# Altium PCB CH340G9T-R0.PcbDoc
Units mil, origin at the board's own origin, x right, y up, seen from the top; angles counter-clockwise.
Board outline 637.64 x 1267.43 mil, 2 copper layers (Top Layer, Bottom Layer); 15 components, 18 nets, 60 pads, 69 vias.
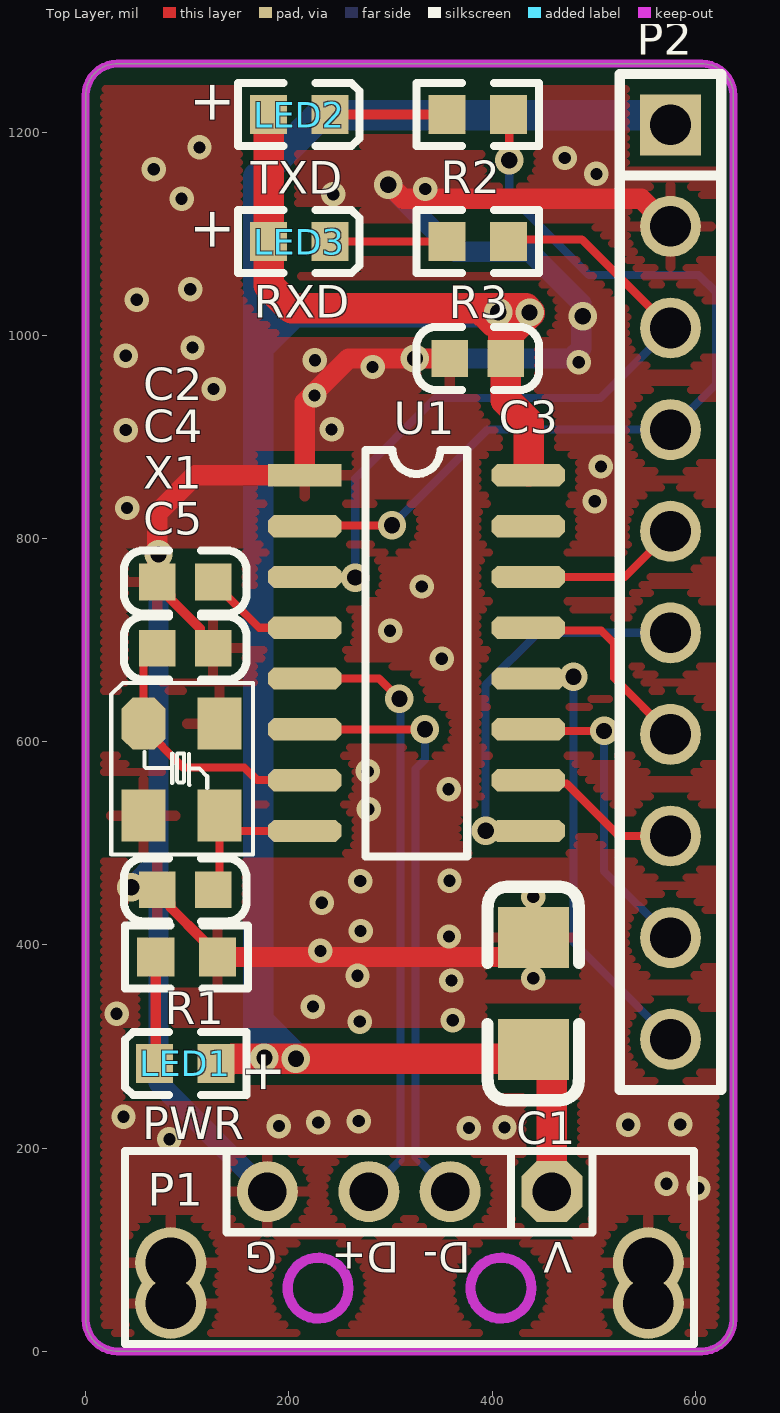
[diagram p0: Top Layer view]
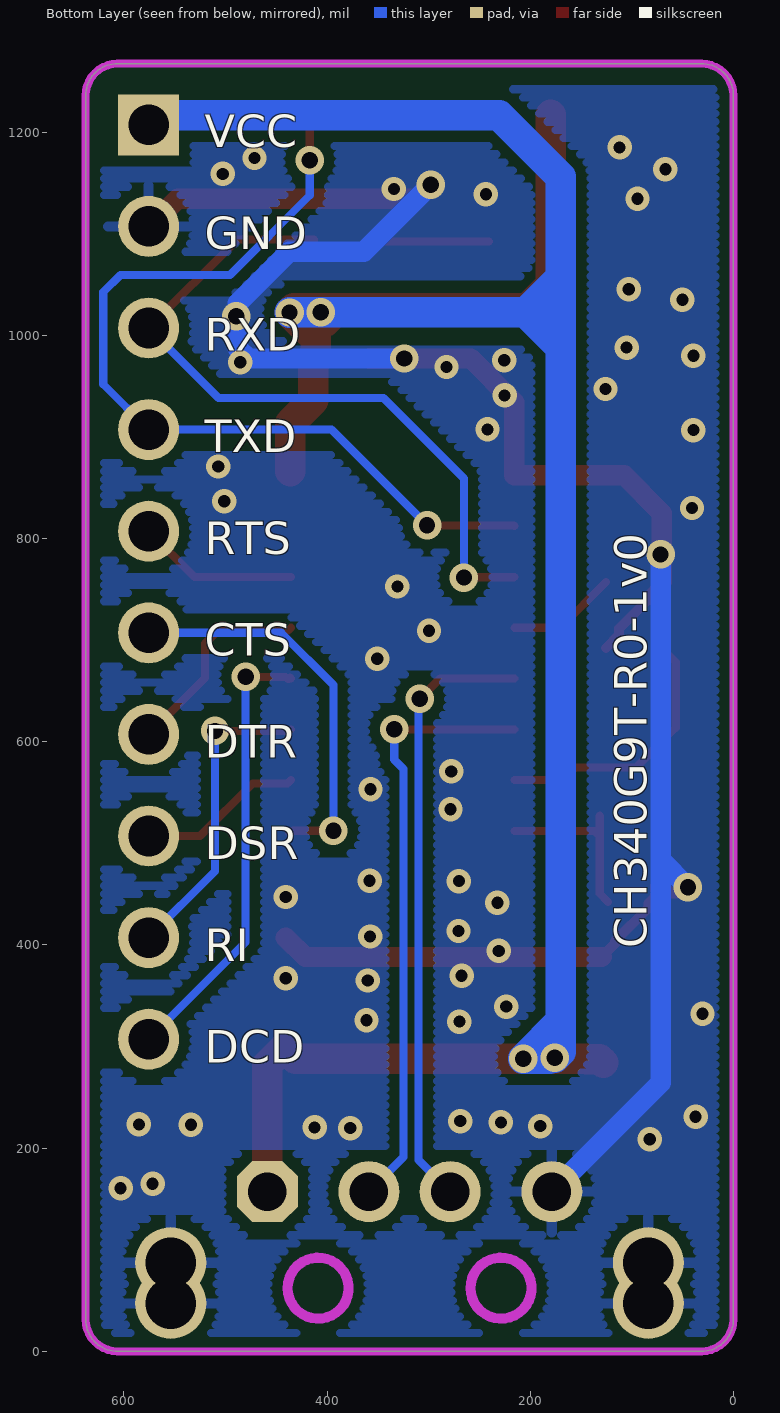
[diagram p1: Bottom Layer view, seen from below]

## Layer stack, top to bottom
Top Solder: solder mask 0.4, Solder Resist, Dk 3.5
Top Layer: signal copper 1.4
Dielectric 1: dielectric 12.6, FR-4, Dk 4.8
Bottom Layer: signal copper 1.4
Bottom Solder: solder mask 0.4, Solder Resist, Dk 3.5

## Board outline
0,31.5 ccw(c31.5,31.5) 31.5,0 606.14,0 ccw(c606.14,31.5) 637.64,31.5 637.64,1235.94 ccw(c606.14,1235.94) 606.14,1267.43 31.5,1267.43 ccw(c31.5,1235.94) 0,1235.94

## Design rules (kind name [scope] priority, off if disabled: settings)
Clearance Clearance_1 [InPolygon] p1: gap=10 ignorepadtopadclearanceinfootprint=FALSE
Clearance [All] p2: gap=6 ignorepadtopadclearanceinfootprint=FALSE
ComponentClearance [All] p1 off: gap=10 collisioncheckmode=3 verticalgap=10 showdistances=FALSE
DiffPairsRouting [All] p1: maxlimit=10 minlimit=7 mostfreqgap=8 toplayer_minwidth=6 toplayer_maxwidth=15 toplayer_prefwidth=8 bottomlayer_minwidth=6 bottomlayer_maxwidth=15 bottomlayer_prefwidth=8 maxuncoupledlength=500
MinimumSolderMaskSliver [All] p1 off: minsoldermaskwidth=10
PolygonConnect PolygonConnect_1 [IsVia] p1: connectstyle=Direct reliefconductorwidth=10 reliefentries=4 polygonreliefangle="90 Angle" airgapwidth=10
PolygonConnect [All] p2: connectstyle=Relief reliefconductorwidth=10 reliefentries=4 polygonreliefangle="90 Angle" airgapwidth=10
RoutingVias [All] p1: holewidth=16 width=28 viastyle="Through Hole" minholewidth=12 minwidth=24 maxholewidth=28 maxwidth=50
SilkToSilkClearance [All] p1 off: silktosilkclearance=10
SilkToSolderMaskClearance [IsPad] p1 off: minsilkscreentomaskgap=10 clearancetoexposedcopper=TRUE
SolderMaskExpansion [All] p1: expansion=4 istentingtop=FALSE
Width [All] p1: maxlimit=100 minlimit=6 preferedwidth=10
25 further rules are at their usual default settings.

## Components (designator, comment, footprint, x,y, rotation, side; value= is the part's Value field where it differs from the comment)
C1 "10uF" 3216_C 440.64,297.23 r270 top
C2 "0.1uF" 0603_C 125.51,757.23 r180 top
C3 "0.1uF" 0603_C 413.44,977.23 r180 top
C4 "33p" 0603_C 70.52,692.23 r0 top
C5 "33p" 0603_C 125.51,454.23 r180 top
LED1 "PWR" 0603+ 128.33,283.23 r180 top
LED2 "TXD" 0603+ 180.01,1217.23 r0 top
LED3 "RXD" 0603+ 180.01,1092.23 r0 top
P1 "USB" USBAM 458.82,157.23 r180 top
P2 "Header 10H" SIP10-2.54mm 575.64,1207.23 r0 top
R1 "2K" 0603 69.08,388.23 r0 top
R2 "2K" 0603 355.64,1217.23 r0 top
R3 "2K" 0603 355.64,1092.23 r0 top
U1 "CH340G" SOP16 215.64,862.23 r270 top
X1 "12MHz" XT3225 56.83,617.78 r270 top

## Footprints (in the part's own frame and the unit in brackets; to place one, negate y for a bottom-side part, rotate by r counter-clockwise, add the part's x,y. Pads: shape width x height; smd on the part's side, far side on the other; paste and mask are expansions set on the pad)
0603 [mm]
  rect 0.93x0.98 smd: 1(0,0) 2(1.54,0)
  silkscreen extent -0.76,-0.79 2.3,0.79
0603+ [mm]
  rect 0.93x0.98 smd: 1(0,0) 2(1.54,0)
  silkscreen extent -0.76,-0.79 2.27,0.79
0603_C [mil]
  rect 36x36 smd: 1(0,0) 2(55,0)
  silkscreen extent -33,-31 88,31
3216_C [mil]
  rect 60x70 smd: 1(0,0) 2(-110,0)
  silkscreen extent -160,-45 50,45
SIP10-2.54mm [mil]
  rect 60x60 hole 40: 1(0,0)
  round 60 hole 40: 2(0,-100) 3(0,-200) 4(0,-300) 5(0,-400) 6(0,-500) 7(0,-600) 8(0,-700) 9(0,-800) 10(0,-900)
  silkscreen extent -50,-950 50,50
SOP16 [mil]
  rect 22x72 smd: 1(0,0)
  oct 22x72 smd: 2(50,0) 3(100,0) 4(150,0) 5(200,0) 6(250,0) 7(300,0) 8(350,0) 9(350,220) 10(300,220) 11(250,220) 12(200,220) 13(150,220) 14(100,220) 15(50,220) 16(0,220)
  silkscreen extent -25,60 375,160
USBAM [mil]
  round 70 hole 50: 0(-95,70) 0(-95,110) 0(375,70) 0(375,110)
  oct 60x60 hole 38: 1(0,0)
  round 60 hole 38: 2(100,0) 3(180,0) 4(280,0)
  Keep-Out Layer circle w10: c50,95 r30
  Keep-Out Layer circle w10: c230,95 r30
  silkscreen extent -140,-40 420,150
XT3225 [mm]
  oct 1.3x1.1 smd: 1(0,0)
  rect 1.3x1.1 smd: 2(2.3,0) 3(2.3,1.9) 4(0,1.9)
  silkscreen extent -1.02,-0.8 3.27,2.74

## Part data
C1 C2 C3 C4 C5: library part CAP, "Capacitor"
LED1 LED2 LED3: library part LED2, "Typical RED, GREEN, YELLOW, AMBER GaAs LED"
P2: "Header, 10-Pin, Right Angle", LatestRevisionDate=17-Jul-2002, LatestRevisionNote="Re-released for DXP Platform.", Publisher="Altium Limited"
R1 R2 R3: library part Res2, "Resistor"
U1: "USB to TTL Serial / UART"
X1: library part CRYSTAL, "Crystal"

## Via types
v1: diameter 24, hole 12, Top Layer to Bottom Layer, 52 vias
v2: diameter 28, hole 16, Top Layer to Bottom Layer, 17 vias

## Nets (pads, with @x,y where several pads share a name; then routed paths per layer and width w, separated by ;. In a path a pad name is that pad's centre, name@x,y a point inside that pad or via, vN(x,y) a via of type N, cw(c..) or ccw(c..) an arc to the next point about the centre after c; other vN are vias at no path point)
CTS: P2.6 U1.9 | length 394.6
  Top Layer w8: v2(393.71,512.44) 433.21,512.44 436.32,509.33 437.43,510.43 U1.9
  Bottom Layer w8: v2(393.71,512.44) 393.71,655.87 445.07,707.23 P2.6
DCD: P2.10 U1.12 | length 442.9
  Top Layer w8: U1.12 436.46,663.05 437.89,661.62 438.27,662 438.62,661.65 440.83,663.85 v2(480.17,663.85)
  Bottom Layer w8: v2(480.17,663.85) 480.17,402.69 P2.10
DSR: P2.8 U1.10 | length 162.8
  Top Layer w8: U1.10 438.89,558.97 473.2,558.97 524.94,507.23 P2.8
DTR: P2.7 U1.13 | length 203.4
  Top Layer w8: U1.13 438.54,709.32 507.5,709.32 520.25,696.56 520.25,662.61 P2.7
GND: C1.2 C2.2 C3.2 C4.2 C5.2 P1.0 P1.4 P2.2 R1.2 U1.1 X1.2 X1.4 | length 2440.2
  Top Layer w10: C2.2 83.51,744.23 83.51,740.47 112.52,711.45 112.52,705.23 C4.2 ; C5.2@72.51,452.23 83.51,441.23 83.51,436.89 116.4,404 116.4,401.53 R1.2
  Top Layer w20: v2(44.84,456.74) 46.1,455.48 71.45,455.48 C5.2@72.12,456.16 ; C2.2 v2@70.51,784.33 ; v2(71.72,784.33) v2@70.51,784.33 ; R1.2 421.64,388.23 C1.2 ; v2(297.91,1148.16) 299.03,1148.16 312.71,1134.48 546.85,1134.48 574.1,1107.23 P2.2 ; C3.2 v2(324.11,977.23) 258.74,977.23 215.64,934.12 U1.1 107.65,862.23 70.51,825.08 v2@70.51,784.33
  Bottom Layer w20: v2(44.84,456.74) 71.72,483.62 ; v2(71.72,784.33) 71.72,483.62 ; P1.4 71.72,264.32 71.72,483.62 ; v2(297.91,1148.16) 363.91,1082.16 437.23,1082.16 487.83,1031.56 487.83,1020.21 v2(489.36,1018.68) 487.83,1017.15 487.83,987.41 477.65,977.23 v2(324.11,977.23)
  other v1: 603.19,160.61 571.76,164.96 82.41,208.81 377.21,219.75 412.25,220.43 190.23,221.7 534,223.07 585.21,223.4 228.89,225.33 268.87,226.65 37.25,230.91 269.78,324.52 361.25,325.93 30.53,332.28 223.67,339.31 360,365 440.64,367.23 267.61,369.76 231.07,394.12 357.63,408.26 270.65,413.7 232.37,441.53 440.64,447.23 270.22,462.85 358.13,463.21 278.55,533.6 357.23,553.3 277.73,570.83 350.52,681.76 299.66,709.25 330.82,752.78 40.84,830.05 501.17,836.67 507.18,870.93 39.45,906.77 242.14,907.45 225.25,940.85 125.94,947.23 282.46,968.89 485.4,973.51 225.61,975.53 39.45,980.01 105.14,987.93 50.31,1035.12 103.04,1045.45 94.5,1134.36 243.65,1138.87 334.23,1144.03 502.7,1158.94 66.97,1163.52 471.48,1174.55 112.08,1185.03
NetC2_1: C2.1 U1.4 | length 108.8
  Top Layer w8: C2.1 170.51,712.23 U1.4
NetC4_1: C4.1 U1.7 X1.1 | length 264.2
  Top Layer w8: C4.1 56.83,678.54 X1.1 56.83,613.84 95.98,574.7 156.12,574.7 168.59,562.23 U1.7
NetC5_1: C5.1 U1.8 X1.3 | length 170.2
  Top Layer w8: C5.1@123.41,442.43 131.64,450.65 X1.3 ; X1.3@134.56,510 136.78,512.23 U1.8
NetLED1_2: LED1.2 R1.1 | length 112.6
  Top Layer w10: LED1.2@67.7,277.23 69.08,278.6 R1.1 R1.1@69.08,389.23
NetLED2_2: LED2.2 R2.1 | length 115
  Top Layer w10: LED2.2 R2.1
NetLED3_2: LED3.2 R3.1 | length 115
  Top Layer w8: LED3.2 R3.1
RI: P2.9 U1.11 | length 305.8
  Top Layer w8: U1.11 437.25,610.61 v2(510.29,610.61)
  Bottom Layer w8: v2(510.29,610.61) 510.29,472.57 P2.9
RTS: P2.5 U1.14 | length 158.6
  Top Layer w8: U1.14 530.64,762.23 P2.5
RXD: P2.3 R3.2 U1.3 | length 717.9
  Top Layer w8: U1.3 215.93,761.93 265.05,761.93 v2(265.35,761.63) ; R3.2@413,1094.5 488.36,1094.5 P2.3
  Bottom Layer w8: v2(265.35,761.63) 265.35,859.26 344.41,938.32 506.73,938.32 P2.3
TXD: P2.4 R2.2 U1.2 | length 875.8
  Top Layer w8: U1.2 216.12,812.71 301.05,812.71 v2(301.53,813.2) ; R2.2 417.35,1216.15 417,1215.8 v2(417,1172.23)
  Bottom Layer w8: v2(301.53,813.2) 395.56,907.23 P2.4 620.28,951.87 620.28,1042.52 603.34,1059.47 495.43,1059.47 417,1137.9 v2(417,1172.23)
UD+: P1.3 U1.5 | length 609.5
  Top Layer w8: U1.5 240.64,662.23 288.82,662.23 v2@314.17,636.87
  Bottom Layer w8: P1.3 309.94,188.35 309.94,630.69 303.82,636.81 v2@303.82,642.23
  other v2: 308.82,642.23
UD-: P1.2 U1.6 | length 591.3
  Top Layer w8: U1.6 v2(333.94,612.23)
  Bottom Layer w8: v2(333.94,612.23) 333.94,582.35 324.68,573.09 324.68,191.36 P1.2
VCC: C1.1 C3.1 LED1.1 LED2.1 LED3.1 P1.1 P2.1 U1.16 | length 2874.7
  Top Layer w30: LED1.1@128.33,284.21 131.64,287.52 144.33,287.52 144.82,288 v2@175,288 ; LED2.1 180.01,1049.09 202.64,1026.46 432.95,1026.46 v2@436.78,1022.63 ; v2@181.05,288 v2(207,288) 431.31,288 442.18,298.87 458.82,282.23 P1.1 ; 388.73,1026.46 v2@401.89,1013.3 ; C3.1@411.74,980.59 411.22,981.11 411.22,996.76 ; C3.1 413.44,936.27 436.01,913.7 U1.16@436.01,866.23 ; 411.22,996.76 v2(436.93,1022.47) v2@436.78,1022.63 ; 411.22,996.76 411.22,1022.63 v2@436.78,1022.63
  Bottom Layer w30: 169.89,344.92 169.89,325.11 ; v2(176,289) 169.89,295.11 169.89,325.11 ; v2@181.05,288 v2(207,288) 169.89,325.11 ; v2(436.93,1022.47) 436.78,1022.63 v2(406.22,1022.63) 204.65,1022.63 ; P2.1 566.15,1216.71 230.69,1216.71 169.89,1155.91 169.89,1057.13 ; 169.89,325.11 169.89,987.87 ; 169.89,987.87 169.89,1057.13 ; 169.89,987.87 204.65,1022.63 ; 169.89,1057.13 204.39,1022.63 204.65,1022.63
pads on no net: U1.15

## Polygon pours and split planes (outlines as drawn)
GND on Bottom Layer "GND_L" (hatched Horizontal grid 8 track 8, remove dead copper, pour order 1): 0.48,1269.01 0.48,-1.54 641.47,-1.54 641.47,1269.01
GND on Top Layer "GND_L" (hatched Horizontal grid 8 track 8, remove dead copper, pour order 0): -1.12,1268.98 -1.12,-2.91 643.48,-2.91 643.48,1271.7

## Keep-outs
Keep-Out Layer:
  the board outline again, w8

## Silkscreen, mask and mechanical layers (free items; w line width, h text height)
Bottom Overlay:
  text "VCC" at 520.4,1185.1 h32
  text "GND" at 520.4,1084.97 h32
  text "RXD" at 520.4,984.85 h32
  text "TXD" at 520.4,884.72 h32
  text "RTS" at 520.4,784.6 h32
  text "CTS" at 520.4,684.47 h32
  text "DTR" at 520.4,584.34 h32
  text "DSR" at 520.4,484.22 h32
  text "CH340G9T-R0-1v0" at 85.47,396.62 h32 r270
  text "RI" at 520.4,384.09 h32
  text "DCD" at 520.4,283.96 h32
Mechanical 1:
  the board outline again, w8

## Text inside footprints (layer, text, board x,y; h text height)
LED1: Top Overlay "+" at 158.13,298 h40 r270
LED2: Top Overlay "+" at 141.93,1206.24 h40 r90
LED3: Top Overlay "+" at 141.93,1081.24 h40 r90
P1: Top Overlay "D-" at 378.82,107.23 h30 r180; Top Overlay "D+" at 308.82,107.23 h30 r180; Top Overlay "V" at 478.82,107.23 h30 r180; Top Overlay "G" at 188.82,107.23 h30 r180